# Altium PCB S868 - V1.PcbDoc
Units mil, origin at the board's own origin, x right, y up, seen from the top; angles counter-clockwise.
Board outline 6000 x 4000 mil, 2 copper layers (Top Layer, Bottom Layer); 5 components, 0 nets, 26 pads, 0 vias.
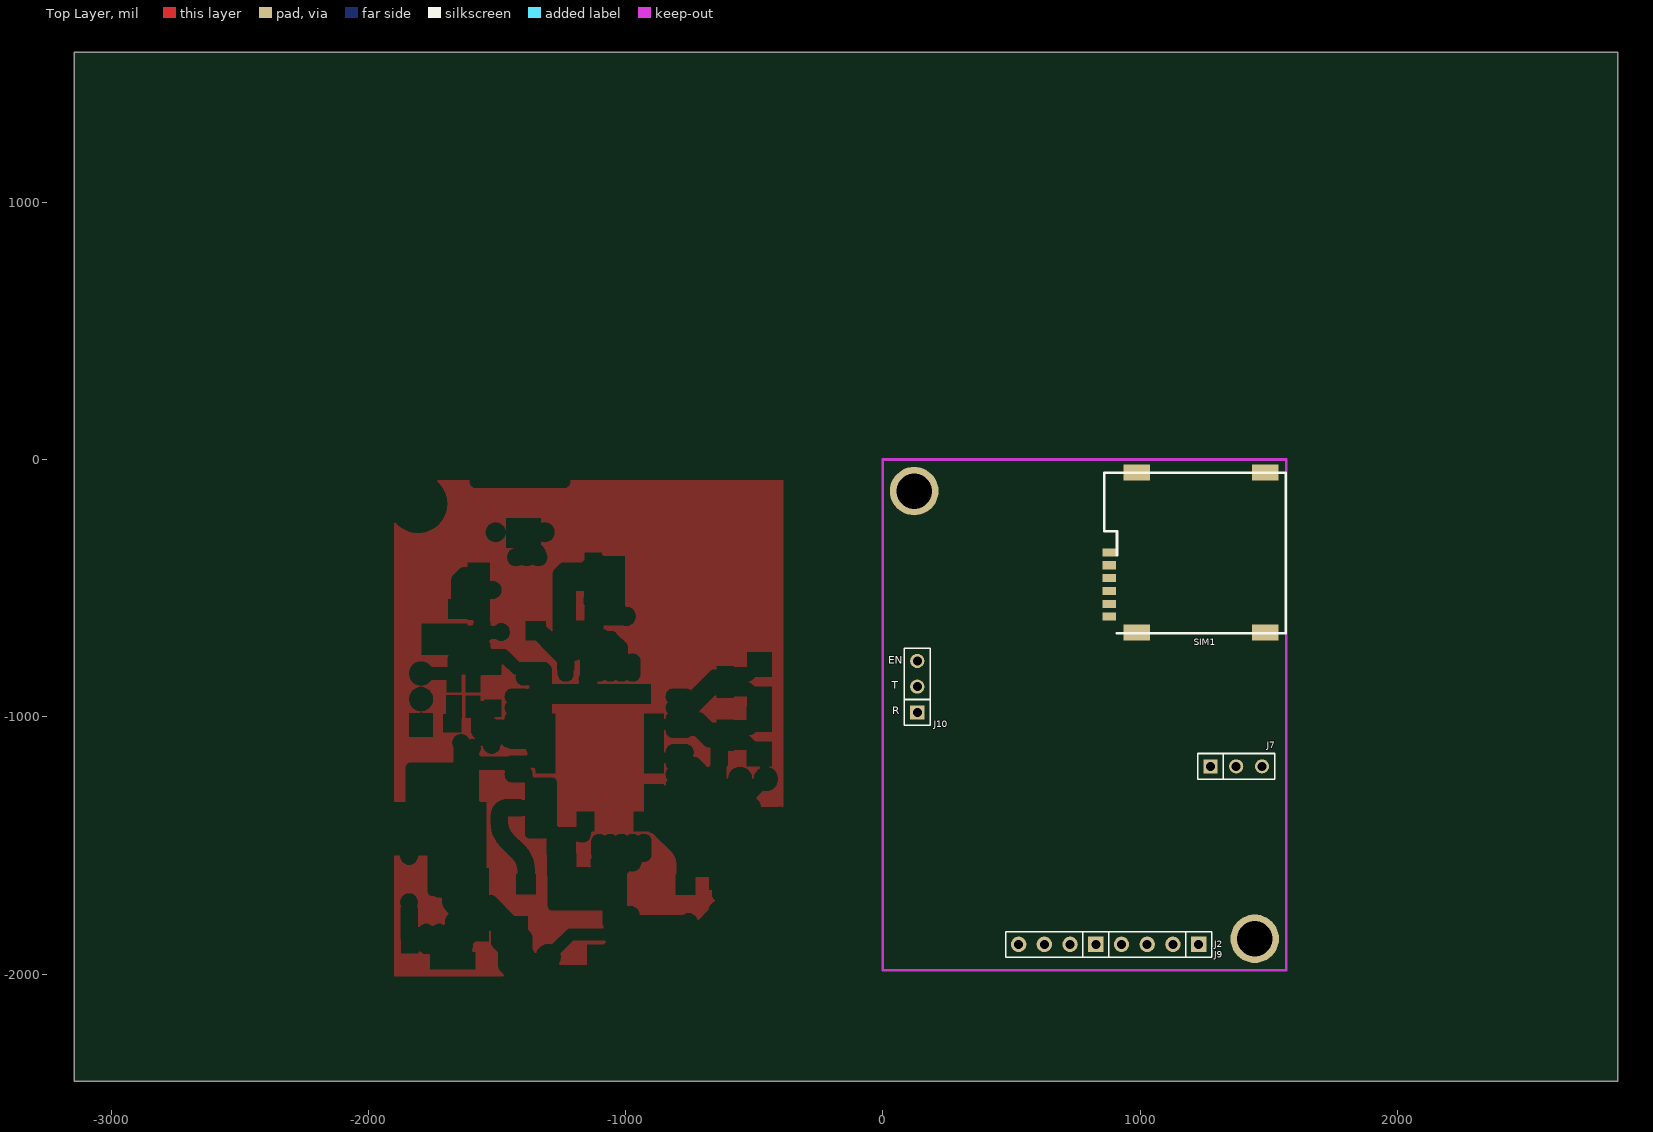
[diagram p0: Top Layer view]
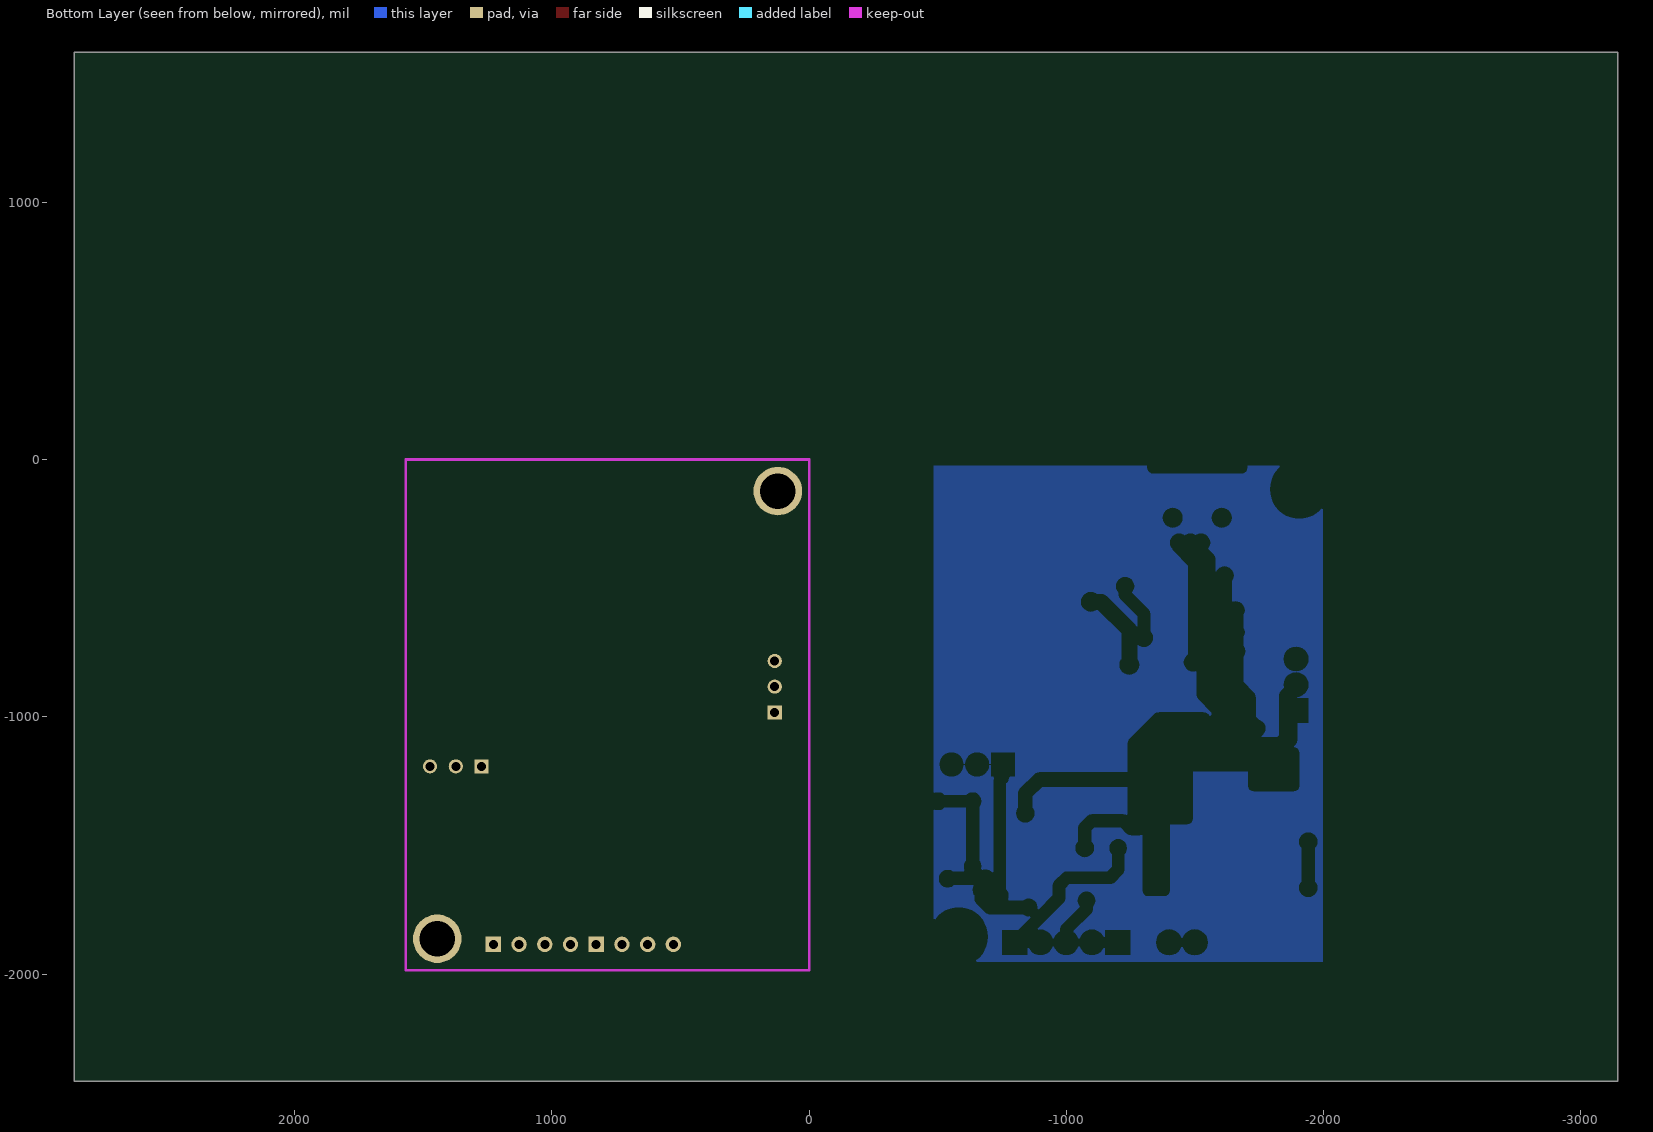
[diagram p1: Bottom Layer view, seen from below]

## Layer stack, top to bottom
Top Layer: signal copper 1.4
Dielectric: dielectric 12.6, FR-4, Dk 4.8
Bottom Layer: signal copper 1.4

## Board outline
-3143,-2416 2857,-2416 2857,1584 -3143,1584

## Design rules (kind name [scope] priority, off if disabled: settings)
Clearance Clearance_4 [All] p1 off: gap=20
Clearance Clearance_3 [InNet('BT_ANT')] p2 off: gap=30
Clearance Clearance_2 [All] p3: gap=10
Clearance Clearance_1 [InNet('GPS_ANT')] p4 off: gap=30
Clearance [InNet('GPS_ANT')] p5 off: gap=30
ComponentClearance [All] p1: gap=0 collisioncheckmode=3 verticalgap=0 showdistances=FALSE
HoleSize [All] p1: absolutevalues=TRUE maxlimit=10000 minlimit=1 maxpercent=80.000 minpercent=20.000
HoleToHoleClearance [All] p1: gap=0 allowstackedmicrovias=TRUE
MinimumSolderMaskSliver [All] p1: minsoldermaskwidth=0
PolygonConnect [All] p1: connectstyle=Direct reliefconductorwidth=10 reliefentries=4 polygonreliefangle="90 Angle"
RoutingVias [All] p1: holewidth=28 width=50 viastyle="Through Hole" minholewidth=28 minwidth=50 maxholewidth=28 maxwidth=50
SilkToSilkClearance [All] p1: silktosilkclearance=0
SilkscreenOverComponentPads [All] p1: minsilkscreentomaskgap=0
SolderMaskExpansion [All] p1: expansion=4
Width [All] p1: maxlimit=1000 minlimit=8 preferedwidth=10 minimp=50.000000 maximp=50.000000 favimp=50.000000
22 further rules are at their usual default settings.

## Components (designator, comment, footprint, x,y, rotation, side; value= is the part's Value field where it differs from the comment)
J2 "CON4" SIP4 828,-1884 r180 top
J7 "SIP3" SIP3 1274,-1192 r0 top
J9 "CON4" SIP4 1228,-1884 r180 top
J10 "SIP3" SIP3 134,-982 r90 top
SIM1 "SIMCARD_MICRO_ZC_6P" SIMCARD_MICRO_ZC_6P 881,-610 r90 top

## Footprints (in the part's own frame and the unit in brackets; to place one, negate y for a bottom-side part, rotate by r counter-clockwise, add the part's x,y. Pads: shape width x height; smd on the part's side, far side on the other; paste and mask are expansions set on the pad)
SIMCARD_MICRO_ZC_6P [mm]
  rect 0.8x1.35 smd: 1(1.27,0) 2(3.81,0) 3(6.35,0) 5(0,0) 6(2.54,0) 7(5.08,0)
  rect 1.55x2.6 smd: 8(-1.56,-2.7) 9(14.24,-2.7) 10(14.24,-15.38) 11(-1.56,-15.38)
  silkscreen extent -1.64,-17.4 14.22,0.5
SIP3 [mil]
  rect 55x55 hole 35: 1(0,0)
  round 55 hole 35: 2(100,0) 3(200,0)
  silkscreen extent -50,-50 250,50
SIP4 [mil]
  rect 60x60 hole 35: 1(0,0)
  round 60 hole 35: 2(100,0) 3(200,0) 4(300,0)
  silkscreen extent -50,-50 350,50

## Part data
J2 J9: "Connector"
J7 J10: library part CON3, "Connector"

## Free pads (board coordinates)
  round 188.98 hole 137.8: 0(122,-122) 0(1446,-1862)

## Nets (pads, with @x,y where several pads share a name; then routed paths per layer and width w, separated by ;. In a path a pad name is that pad's centre, name@x,y a point inside that pad or via, vN(x,y) a via of type N, cw(c..) or ccw(c..) an arc to the next point about the centre after c; other vN are vias at no path point)
pads on no net: J2.1 J2.2 J2.3 J2.4 J7.1 J7.2 J7.3 J9.1 J9.2 J9.3 J9.4 J10.1 J10.2 J10.3 SIM1.1 SIM1.2 SIM1.3 SIM1.5 SIM1.6 SIM1.7 SIM1.8 SIM1.9 SIM1.10 SIM1.11

## Polygon pours and split planes (outlines as drawn)
no net on Top Layer "Top Layer-No Net" (solid, remove dead copper, pour order 1000): -1898.58,-78.74 -1898.58,-2008.74 -383.58,-2008.74 -383.58,-78.74 -1898.58,-78.74
no net on Bottom Layer "Top Layer-No Net" (solid, remove dead copper, pour order 1001): -484,-23.33 -1996,-23.33 -1996,-420.33 -1996,-1952.33 -1885,-1952.33 -484,-1952.33 -484,-23.33

## Keep-outs
Keep-Out Layer:
  lines w10: 0,0 0,-1984 1568,-1984 1568,1 48,1 0,1

## Silkscreen, mask and mechanical layers (free items; w line width, h text height)
Top Overlay:
  text "EN" at 21,-802 h50
  text "T" at 34,-899 h50
  text "R" at 36,-999 h50